# EAGLE board BATT_DCDC (EAGLE 9.6.2)
REV: C
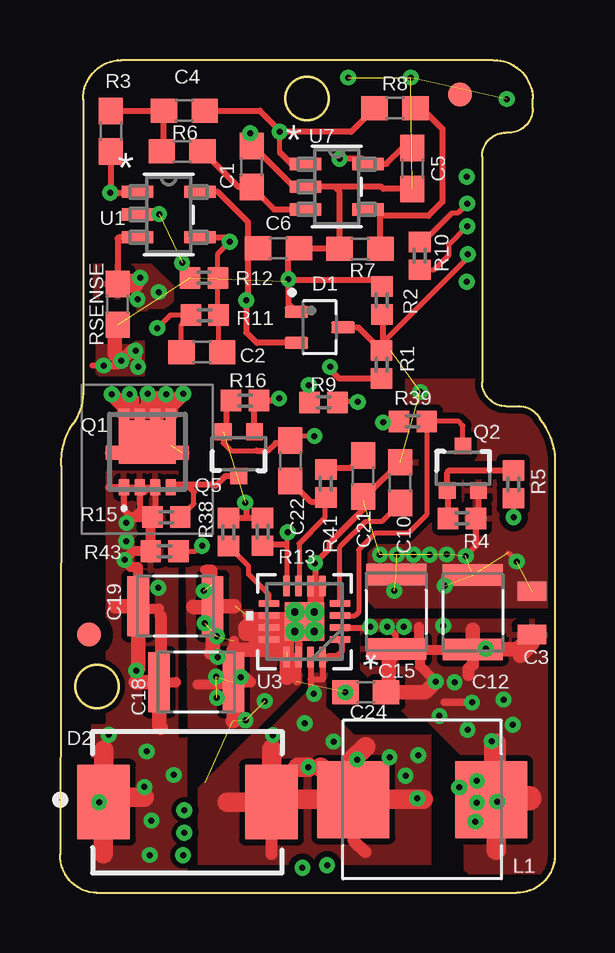
[diagram p0: board, top side]
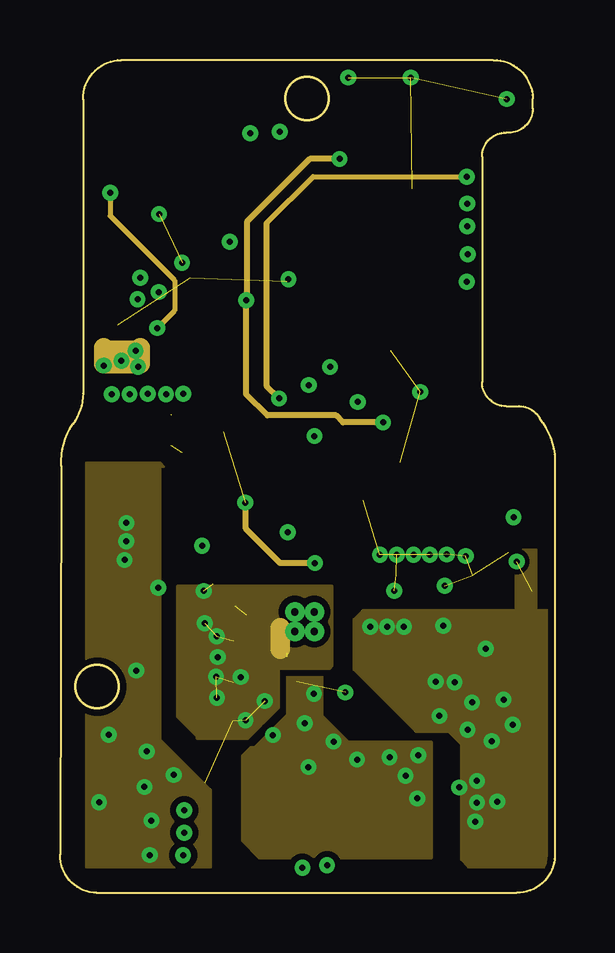
[diagram p1: board, inner layer Route2]
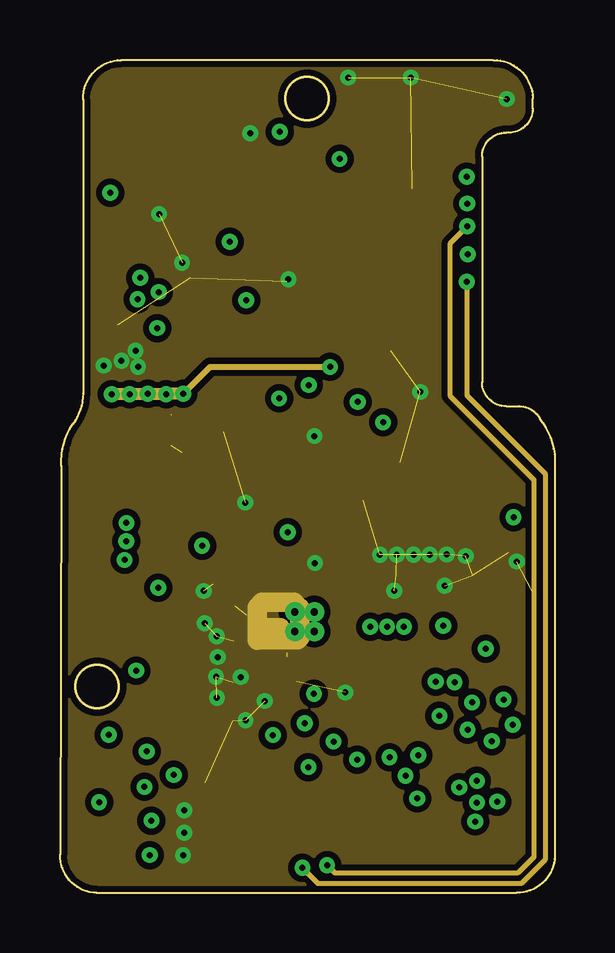
[diagram p2: board, inner layer Route15]
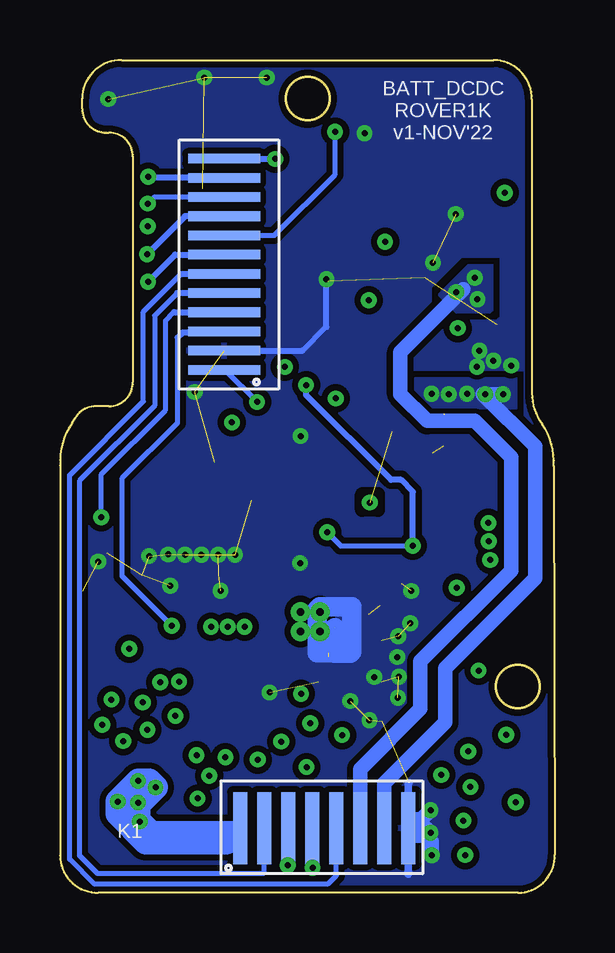
[diagram p3: board, bottom side, seen from below]

Size 20.62 x 34.7 mm. Coordinates in mm from the lower left corner, seen from the top.
Outline: 18.05,34.7 2.55,34.7 arc90 0.96,33.06 0.96,20.81 arc-37 0.53,19.53 arc37 0.05,17.79 0,1.59 arc90 1.53,0 19.03,0 arc90 20.62,1.55 20.62,17.8 arc37 20.12,19.58 arc-7 19.99,19.78 arc60 19.12,20.27 18.58,20.27 arc-90 17.58,21.27 17.58,30.67 arc-90 18.58,31.67 18.7,31.67 arc90 19.7,32.67 19.7,33.09 arc90 18.05,34.7
Outline: circle at 10.3,33.09 radius 0.9
Outline: circle at 1.55,8.59 radius 0.9
Copper layers (1+2*15+16): Top 0.035mm / dielectric 1.5mm / Route2 0.035mm / dielectric 0.15mm / Route15 0.035mm / dielectric 0.2mm / Bottom 0.035mm
Design rules "adafruit *": minimum track width 0.15mm, minimum drill 0.25mm, track to track 8mil, track to pad 8mil, pad to pad 8mil, via to via 8mil, smd to smd 5mil, copper to edge 8mil, drill to drill 8mil, minimum pad ring 10mil, minimum via ring 8mil, stop-mask expansion 2mil, vias tented up to drill 20mil, thermal gap 10mil
Net classes: 2 gnd: width 0.305 mm, drill 0.483 mm, clearance 0.203 mm
bRestrict: area 7.4,16 to 8,16.6

## Footprints (pad centres in the part's own frame; a part is rotated, then mirrored left to right if it is on the bottom)
0603-NO = smd 1.1 x 1: 1 -0.85,0; 2 0.85,0
0603 = smd 1.1 x 1: 1 -0.85,0; 2 0.85,0
0805 = smd 0.8 x 1.2: 1 -0.9,0; 2 0.9,0
WCAP-CSGP_1210 = smd 0.9 x 2.5: 1 -1.55,0; 2 1.55,0
SOT65P210X110-3N = smd 0.99 x 0.5: 1 -0.97,0.65; 2 -0.97,-0.65; 3 0.97,0
DIOM7959X250N = smd 2.2 x 3.1: A 3.5,0; C -3.5,0
FLEX8 = smd 0.6 x 3: 1 0.8,2.05; 2 1.8,2.05; 3 2.8,2.05; 4 3.8,2.05; 5 4.8,2.05; 7 5.8,2.05; 8 6.8,2.05; 9 7.8,2.05
FLEX6 = smd 0.4 x 3: 1 -2.5,-0.25; 2 -1.7,-0.25; 3 -0.9,-0.25; 4 -0.1,-0.25; 5 0.7,-0.25; 6 1.5,-0.25; 7 2.3,-0.25; 8 3.1,-0.25; 9 3.9,-0.25; 10 4.7,-0.25; 11 5.5,-0.25; 12 6.3,-0.25
INDM7366X500 = smd 3 x 3.2: 1 -2.87,0; 2 2.87,0
NVTFS5124PLTWG = smd 0.42 x 0.66: 1 -0.975,-1.47; 2 -0.325,-1.47; 3 0.325,-1.47; 4 0.975,-1.47 | smd 0.42 x 0.47: 5 0.975,1.565; 6 0.325,1.565; 7 -0.325,1.565; 8 -0.975,1.565 | smd 2.37 x 1.83: 9 0,0.415 | smd 0.545 x 0.57: 10 1.458,-0.035; 11 -1.458,-0.035
SOT323 = smd 0.7 x 0.7: 1 -0.65,-0.925; 2 0.65,-0.925; 3 0,0.925
0402 = smd 0.85 x 0.9: 1 -0.58,0; 2 0.58,0
SOT-23-5_MC_MCH = smd 1.31 x 0.508: 1 -1.295,0.95; 2 -1.295,0; 3 -1.295,-0.95; 4 1.295,-0.95; 5 1.295,0.95
RTE16_1P66X1P66_TEX = smd 0.85 x 0.28: 1 -1.475,0.75; 2 -1.475,0.25; 3 -1.475,-0.25; 4 -1.475,-0.75; 9 1.475,-0.75; 10 1.475,-0.25; 11 1.475,0.25; 12 1.475,0.75 | smd 0.28 x 0.85: 5 -0.75,-1.475; 6 -0.25,-1.475; 7 0.25,-1.475; 8 0.75,-1.475; 13 0.75,1.475; 14 0.25,1.475; 15 -0.25,1.475; 16 -0.75,1.475 | smd 1.66 x 1.6: 17 0,0 | drill 0.305 pad 0.508: V -0.406,-0.406; V_1 -0.406,0.406; V_2 0.406,-0.406; V_3 0.406,0.406
FIDUCIAL_1MM = smd 1 x 1: 1 0,0

## Placement (x,y rotation side)
C1  1u  [0603-NO]  7.98,30.26 90 top
C2  100n  [0603]  5.91,22.52 0 top
C3  10uF  [0805]  19.67,11.66 270 top
C4  1u  [0603-NO]  5.18,32.59 0 top
C5  100n  [0603]  14.68,30.18 270 top
C6  100n  [0603]  9.1,26.85 0 top
C10  47nF  [0603]  14.17,17.09 90 top
C12  47uF 16V  [WCAP-CSGP_1210]  17.2,11.69 270 top
C15  47uF 16V  [WCAP-CSGP_1210]  14.01,11.71 270 top
C18  47uF 25V  [WCAP-CSGP_1210]  5.68,8.78 180 top
C19  47uF 25V  [WCAP-CSGP_1210]  4.81,11.94 180 top
C21  2.2nF  [0603]  12.63,17.37 90 top
C22  270PF  [0603]  9.6,18 270 top
C24  0.1uF  [0603]  12.74,8.35 0 top
D1  BAT54SW,115  [SOT65P210X110-3N]  10.82,23.56 0 top
D2  B520C-13-F  [DIOM7959X250N]  5.31,3.78 0 top
K1  FLEX8  [FLEX8]  13.91,0.64 0 bottom
K2  FLEX6  [FLEX6]  14.03,24.29 90 bottom
L1  2.2uH - 74437346022  [INDM7366X500]  15.09,3.88 180 top
Q1  NVTFS9D6P04M8LTAG  [NVTFS5124PLTWG]  3.64,18.37 0 top
Q2  2N7002PW  [SOT323]  16.79,17.69 0 top
Q5  2N7002PW  [SOT323]  7.45,18.29 180 top
R1  169k  [0402]  13.4,22.01 90 top
R2  39k  [0402]  13.41,24.68 90 top
R3  2k4  [0603]  2.12,31.73 270 top
R4  100k  [0402]  16.75,15.6 180 top
R5  33R  [0402]  18.89,17.02 270 top
R6  62k  [0603]  5.09,30.9 180 top
R7  2k4  [0603]  12.5,26.83 180 top
R8  36k  [0603]  13.96,32.69 0 top
R9  5k6  [0402]  10.98,20.43 0 top
R10  330R  [0402]  14.99,26.54 270 top
R11  5k1  [0402]  6.03,24.07 0 top
R12  8k2  [0402]  6,25.62 180 top
R13  7k5  [0402]  8.44,15.04 90 top
R15  100k  [0402]  4.43,15.65 180 top
R16  100k  [0402]  7.71,20.51 180 top
R38  78k7  [0402]  7.02,15.03 270 top
R39  78k7  [0402]  14.7,19.64 0 top
R41  56k2  [0402]  11.08,17.05 90 top
R43  30k  [0402]  4.36,14.23 0 top
RSENSE  100mR  [0603]  2.4,24.52 90 top
U1  MCP6071T-E/OT  [SOT-23-5_MC_MCH]  4.53,28.26 0 top
U3  TPS55330RTET  [RTE16_1P66X1P66_TEX]  10.19,11.3 180 top
U7  MCP6071T-E/OT  [SOT-23-5_MC_MCH]  11.53,29.42 0 top
U$1  FIDUCIAL""  [FIDUCIAL_1MM]  16.66,33.26 90 top
U$2  FIDUCIAL""  [FIDUCIAL_1MM]  1.21,10.76 90 top

## Library data of the parts
C1 C4 = microbuilder
C2 = SparkFun-Capacitors; PROD_ID: CAP-00810; VALUE: 0.1uF
C3 = SparkFun-Capacitors; PROD_ID: CAP-11330
C5 C6 C24 = SparkFun-Capacitors; PROD_ID: CAP-00810
C10 = SparkFun-Capacitors; PROD_ID: CAP-08605
C12 C15 C18 C19 = Wurth_Elektronik_Passive_Capacitors_rev19a; WE-NUMBER: 885012109003/47uF
C21 = SparkFun-Capacitors; PROD_ID: CAP-07877
C22 = SparkFun-Capacitors; PROD_ID: CAP-13339
D1 = BAT54SW_115; AVAILABILITY: In Stock; DESCRIPTION: Diode Array 1 Pair Series Connection Schottky 30 V 200mA (DC) Surface Mount SC-70, SOT-323; MF: Nexperia USA Inc.; MP: BAT54SW,115; PACKAGE: SOT-323 Nexperia USA Inc.; PRICE: None; PURCHASE-URL: https://pricing.snapeda.com/search/part/BAT54SW,115/?ref=eda
D2 = B520C-13-F; AVAILABILITY: Unavailable; DESCRIPTION: Diode Schottky 20V 5A Surface Mount SMC; DIGIKEY-PURCHASE-URL: https://snapeda.com/shop?store=DigiKey&id=325969; MF: Diodes Inc.; MP: B520C-13-F; PACKAGE: DO-214 Diodes Inc.; PRICE: None
K1 = Flex_3mm
K2 = Flex
L1 = Inductance_2.2uH; DESCRIPTION: 10µH Shielded Molded Inductor 3.2A 69mOhm Max Nonstandard; DIGIKEY-PURCHASE-URL: https://snapeda.com/shop?store=DigiKey&id=586788; MF: Wurth Electronics; MP: 74437349100; PACKAGE: Nonstandard Wurth Electronics
Q1 = SamacSys_Parts; DESCRIPTION: MOSFET MV8 P INITIAL PROGRAM; HEIGHT: 0.8mm; MANUFACTURER_NAME: ON Semiconductor; MANUFACTURER_PART_NUMBER: NVTFS9D6P04M8LTAG; MOUSER_PART_NUMBER: 863-NVTFS9D6P04M8LTG; MOUSER_PRICE-STOCK: https://www.mouser.co.uk/ProductDetail/ON-Semiconductor/NVTFS9D6P04M8LTAG/?qs=xZ%2FP%252Ba9zWqYALd8g5rll2Q%3D%3D
Q2 Q5 = SparkFun-DiscreteSemi; PROD_ID: TRANS-11151
R1-R13 R15 R16 R38 R39 R41 R43 RSENSE = SparkFun-Resistors
U1 U7 = MCP6071; BUILT_BY: EMA_Jessica; COPYRIGHT: Copyright (C) 2018 Accelerated Designs. All rights reserved; MANUFACTURER_PART_NUMBER: MCP6071T-E/OT; SOURCELIBRARY: Microchip_2019-08-23_21; VENDOR: Microchip
U3 = TPS55330; BUILT_BY: EMA_UL_Team; MANUFACTURER_PART_NUMBER: TPS55330RTET; SOURCELIBRARY: TI_2015-1-5; VENDOR: Texas Instruments
U$1 U$2 = microbuilder; BOM: EXCLUDE

## Nets
!RESET: K2.10 R10.1
COMP_TPS: C22.2 R41.1 U3.7
EN_DCDC: K2.4 R5.2
EN_TPS: Q2.3 R39.2 U3.3
FB: R9.1 R13.1 R43.2 U3.8
FB_DAC: K2.1 R9.2
FREQ_TPS: R38.2 U3.9
GND: C1.2 C3.1 C5.2 C6.2 C10.2 C12.1 C15.1 C18.1 C19.1 C21.1 C22.1 C24.1 D1.1 K1.9 K2.2 Q2.2 Q5.2 R2.2 R4.1 R7.2 R12.2 R13.2 R16.2 R38.1 RSENSE.1 U1.2 U3.5 U3.6 U3.10 U3.11 U3.12 U3.13 U3.14 U3.17 U7.2
IOSENSE: C4.2 K2.8 R8.1 U7.1
ISENSE_RAW: C2.1 R3.2 R11.1 U1.1
N$1: C2.2 R11.2 R12.1 U1.4
N$2: R7.1 R8.2 U7.4
N$3: C4.1 R3.1 R6.2
N$4: Q2.1 R4.2 R5.1
N$5: C1.1 R6.1 U7.3
N$6: K1.3 R10.2
N$8: Q1.4 Q5.3 R15.1
N$35: C10.1 U3.4
N$43: C21.2 R41.2
OP_SWITCH: K2.11 Q5.1 R16.1
SW2_TPS: D2.A L1.2 U3.1 U3.15 U3.16
SWCLK: K1.5 K2.6
SWDIO: K1.2 K2.5
TXO: K1.4 K2.7
VBUS: C3.2 C12.2 C15.2 C24.2 K1.1 K2.3 L1.1 U3.2
VCC: C5.1 C6.1 D1.2 K2.12 R39.1 U1.5 U7.5
VOUT+: K1.8 Q1.5 Q1.6 Q1.7 Q1.8 Q1.9 Q1.10 Q1.11 R1.1
VOUT-: K1.7 RSENSE.2 U1.3
VOUTSENSE: D1.3 K2.9 R1.2 R2.1
VSOURCE: C18.2 C19.2 D2.C Q1.1 Q1.2 Q1.3 R15.2 R43.1

## Tracks (layer width: path | path; a pad name or v marks a point on that pad's centre or on a via)
!RESET  (via drill 0.25)
  Top 0.203: v16.96,28.72 16.56,28.32 16.33,28.32 15.13,27.12 R10.1
  Bottom 0.203: K2.10 16.69,28.99 v16.96,28.72
COMP_TPS
  Top 0.203: U3.7 9.96,12.79 9.96,14.55 11.04,15.63 11.04,16.43 R41.1
  Top 0.254: R41.1 10.91,16.3 10.45,16.3 C22.2
EN_DCDC  (via drill 0.25)
  Top 0.203: R5.2 v18.89,15.66 v18.9,15.65
  Bottom 0.203: 15.88,24.19 16.22,23.84 16.22,20.11 18.9,17.44 v18.9,15.65
  Bottom 0.254: 15.88,24.19 K2.4
EN_TPS
  Top 0.2: 14.44,14.99 14.25,14.99
  Top 0.203: U3.3 12.3,11.55 12.44,11.69 12.44,14.29 13.14,14.99 14.25,14.99 | Q2.3 16.79,19.47 16.62,19.64 R39.2 15.28,15.76 14.51,14.99 14.44,14.99
FB  (via drill 0.25)
  Top 0.203: R9.1 10.3,20.53 | R43.2 5.63,14.23 5.86,14.46 v5.92,14.46 | v9.49,15.02 9.44,14.97 9.44,14.53 U3.8
  Top 0.254: v10.37,21.16 10.37,20.53 10.3,20.53 | R13.1 8.51,14.53 9.44,14.53
  Bottom 0.203: v9.49,15.02 8.93,14.46 v5.92,14.46
  Bottom 0.254: v5.92,14.46 5.92,16.71 6.41,17.2 6.83,17.2 10.37,20.74 v10.37,21.16
FB_DAC  (via drill 0.25)
  Top 0.203: v12.41,20.45 11.58,20.45 R9.2
  Bottom 0.203: v12.41,20.45 13.75,21.79
  Bottom 0.254: 13.75,21.79 K2.1
FREQ_TPS
  Top 0.203: U3.9 8.7,12.06 8.7,12.43 7.84,13.29 7.84,13.62 R38.2
GND  (via drill 0.25)  (35 unrouted)
  Top 0.15: 6.55,10.71 v6.53,10.69
  Top 0.2: 10.44,12.47 10.44,12.43 | C21.1 12.63,16.41 12.63,16.36 | U3.5
  Top 0.203: C22.1 9.78,19.03 v10.6,19.03 | 18.67,14.16 v19.03,13.8 | R4.1 17.44,15.71 | 17.33,14.45 v16.91,14.03 | C1.2 7.93,31.16 v7.93,31.65 | R12.2 5.42,25.91 v5.08,26.25 | Q5.2 6.8,18.74 7.12,18.42 8.19,18.42
  Top 0.254: U3.12 8.67,10.5 | U3.14 9.94,9.76 | 9.44,9.76 U3.13 | U1.2 4.05,28.26 4.08,28.23 v4.13,28.28 | C19.1 6.04,12.26 6.04,12.54 6.38,12.88 | C10.2 12.91,16.68 12.63,16.68 C21.1 | v1.82,21.97 1.35,21.97 | R16.2 7.11,20.51 6.92,20.32 6.92,19.33 Q5.2 | C1.2 8.28,30.81 8.34,30.81 9.73,29.42 U7.2 11.54,29.42 | 11.54,29.42 13.38,29.42 13.47,29.33 C5.2 | 17.44,15.71 Q2.2 | R4.1 17.33,14.45 | R2.2 13.14,25.53 9.52,25.53 9.44,25.45 | 9.44,25.48 v9.52,25.56 | C22.1 9.49,18.74 8.98,18.74 8.66,18.42 8.19,18.42 | 11.54,29.42 11.49,29.37 11.65,29.21 R7.2 11.63,26.85 C6.2 9.52,26.42 v9.52,25.56 | 10.7,12.76 10.65,12.81 10.65,13.71 v10.62,13.74 11.23,14.35 11.23,14.59 12.63,15.99 12.63,16.41 | R38.1 7.75,15.62 | 7.75,15.62 R13.2 | v7.72,16.26 7.75,16.23 7.75,15.62 | v9.52,25.56 9.52,24.54 D1.1
  Top 0.305: v3.15,22.58 3.25,22.48 v3.25,21.92 | v1.82,21.97 2.38,21.97 2.56,22.15 v2.56,22.17 | U3.10 8.7,11.54 7.82,11.54 7.77,11.59 | U3.11 7.72,11.05 7.6,10.93 7.75,10.79 7.98,10.55 U3.12 | U3.10 8.72,11.03 | 8.72,11.03 U3.12 | U3.12 8.72,9.95 8.83,9.83 U3.14 | U3.6 10.44,12.47 | U3.17 10.47,11.58 10.47,12.75 U3.6 | U3.17 10.85,11.96 10.85,12.7 U3.5 10.92,12.76 10.7,12.76 10.46,12.76 U3.6 | U3.17 9.94,11.55 U3.10 | U3.17 9.92,11.03 8.72,11.03 | U3.17 9.44,10.55 | 9.44,10.55 U3.12 | 9.44,10.55 U3.13 9.44,8.96 9.44,8.91 9.43,8.9 | U3.17 9.94,11.05 U3.14 | U3.14 9.91,9.79 9.91,8.84 9.86,8.79 | v6.57,9.82 6.39,10 6.31,10 | 7.26,11.94 7.29,11.97
  Top 0.406: C18.1 7.13,8.68 5.73,8.68 | 7.24,10.5 7.24,10.12 C18.1 | 6.05,13.45 6.36,13.45 C19.1 6.36,11.96 | C18.1 7.96,8.78 7.75,8.99 v7.53,8.99
  Top 0.508: v3.15,22.58 3.09,22.64 3.03,22.64 v2.56,22.17
  Top 0.61: RSENSE.1 2.28,23.55 2.28,22.45 v2.56,22.17 | C19.1 6.32,11.9 5.58,11.9 5.56,11.92 | C19.1 7.26,11.94 | C19.1 6.36,10.05 6.31,10 | C18.1 7.23,7.17 7.2,7.14 | U3.17 7.97,11.3 7.72,11.05 | U3.17 9.67,10.79 7.75,10.79 | U3.17 9.44,10.55 9.44,8.96 | U3.17 9.01,10.12 7.24,10.12 | U3.17 10.7,11.81 10.7,12.76
  Route2 0.254: v10.62,13.74 9.17,13.74 7.74,15.17 7.74,16.24 v7.72,16.26
  Route2 0.61: 1.83,22.72 3.34,22.72
  Route2 0.813: 9.17,11.04 9.17,10.14 | 3.34,22.72 3.34,22.04 1.83,22.04 1.83,22.72
  Route15 0.813: 9.17,11.04 8.69,11.04 8.3,10.65 8.41,10.54 9.9,10.54 9.99,10.63 9.99,11.88 9.77,12.1 8.41,12.1 8.21,11.9 8.21,10.52
  Bottom 0.203: 10.51,22.59 9.52,23.58
  Bottom 0.254: K2.2 10.51,22.59 | 9.52,23.58 v9.52,25.56
  Bottom 0.305: 6.06,4.58 6.11,4.53 K1.9 6.12,0.77
  Bottom 0.61: K1.9 6.11,3.06 5.56,3.06 v5.18,3.44 | v5.18,2.5 5.37,2.69 K1.9 | v5.13,1.56 5.13,2.12 5.39,2.38 6.11,2.38 K1.9
  Bottom 0.813: 9.17,11.04 9.17,9.99 8.53,9.99 8.47,10.05 8.47,11.92 9.8,11.92 9.91,11.81 9.91,10 9.45,10
  other vias: 13.93,12.59 16.03,12.79 16.11,14.1 15.41,14.09 14.73,14.09 14.03,14.09 13.33,14.09 8.53,7.99 7.73,7.19 6.54,8.13 6.5,9 6.03,11.23 5.99,12.58 11.89,8.35 12.01,33.97 14.61,33.97 18.61,33.07 15.01,20.87
  pour Top (isolate 0.003): 5.37,6.88 5.29,13.59 5.37,13.61 7.5,13.61 7.5,11.79 10.15,11.79 10.15,8.81 8.22,6.88
  pour Top (isolate 0.254, no thermals): 20.41,11.89 20.41,14.49 12.95,14.49 11.73,13.28 13.12,11.89
  pour Bottom (isolate 0.254, rank 3): 22.5,-0.87 22.5,34.63 -0.41,34.63 -0.41,0.79 1.25,-0.87
  pour Route2 (isolate 0.254): 5.71,6.44 7.82,6.44 9.09,7.71 9.09,9.36 11.23,9.36 11.32,9.45 11.32,12.77 4.91,12.77 4.91,7.33 5.73,6.51
  pour Route15 (isolate 0.254, rank 2): 22.67,-0.84 22.67,34.87 -0.36,34.87 -0.36,-0.84
  pour Top (isolate 0.305): 1.51,22.87 1.51,21.67 1.61,21.57 3.51,21.57 3.51,22.97 1.51,22.97
  pour Top (isolate 0.254, rank 3): 14.41,21.37 14.41,13.67 21.11,13.67 21.11,21.37
IOSENSE  (via drill 0.25)
  Top 0.203: 9.17,30.83 9.16,30.85 9.16,31.76
  Top 0.254: C4.2 8.33,32.59 9.16,31.76 9.16,31.75 v9.16,31.71 12.13,31.71 R8.1 | U7.1 9.64,30.37 9.17,30.83
  Bottom 0.203: K2.8 11.69,27.39 9.16,29.92 v9.16,31.71
ISENSE_RAW  (via drill 0.25)
  Top 0.203: C2.1 5.06,23.68 R11.1 4.59,24.07 v4.05,23.53
  Top 0.254: U1.1 3.2,29.17 v2.09,29.17 2.12,29.2 R3.2
  Route2 0.203: v2.09,29.17 2.09,28.2 4.78,25.51 4.78,24.26 v4.05,23.53
N$1  (via drill 0.25)
  Top 0.203: C2.2 6.61,22.67 R11.2 6.58,24.1 R12.1 6.58,26.63 v7.08,27.13
  Top 0.254: v7.08,27.13 7.08,27.15 6.92,27.31 U1.4
N$2
  Top 0.254: U7.4 13.11,28.47 13.37,28.21 | R8.2 15.08,32.69 15.93,31.84 15.93,28.79 15.35,28.21 13.37,28.21 | R7.1 13.35,28.19 13.37,28.21
N$3
  Top 0.254: R3.1 C4.1 4.33,30.99 R6.2
N$4
  Top 0.203: 16.17,16.73 Q2.1
  Top 0.254: Q2.1 16.14,17.52 16.22,17.6 R5.1 | R4.2 16.17,16.73
N$5
  Top 0.254: R6.1 7.43,29.41 C1.1 8.92,28.47 U7.3
N$6  (via drill 0.25)
  Top 0.203: R10.2 15.59,25.96 16.19,26.56 16.19,26.99 v16.97,27.77
  Route15 0.203: v16.97,27.77 16.24,27.04 16.24,20.72 19.74,17.22 19.74,1.49 19.07,0.82 11.46,0.82 v11.13,1.15
  Bottom 0.203: v11.13,1.15 11.11,1.17 K1.3
N$7
  pour Route15 (isolate 0.254): 7.42,16.56 7.42,15.98 8.01,15.98 8.01,16.56
N$8
  Top 0.203: 6.48,17.01 6.48,16.95 | R15.1 5.58,16.21 5.58,16.71
  Top 0.254: 6.48,17.01 4.73,17.01 Q1.4 5.38,16.9 5.58,16.71 | Q5.3 6.89,17.36 6.48,16.95
N$35
  Top 0.203: U3.4 11.67,14.41 12.72,15.47 13.4,15.47 C10.1
N$43
  Top 0.254: C21.2 12.12,17.71 11.16,17.71 R41.2
OP_SWITCH  (via drill 0.25)
  Top 0.254: Q5.1 8.1,20.51 R16.1 9.09,20.51 9.16,20.57 v9.13,20.6
  Route2 0.203: v16.95,29.84 10.55,29.84 8.6,27.89
  Route2 0.254: 8.6,27.89 8.6,21.13 v9.13,20.6
  Bottom 0.203: 16.9,29.79 v16.95,29.84
  Bottom 0.254: K2.11 16.9,29.79
SW2_TPS  (via drill 0.25)
  Top 0.15: 11.04,9.73 U3.16 10.5,9.83 10.47,9.79
  Top 0.2: v10.58,8.29 10.61,8.32
  Top 0.203: 10.61,8.32 10.44,8.15
  Top 0.254: 11.04,9.73 11.16,9.85 11.52,9.85 11.74,10.07 11.74,10.4 11.67,10.48 U3.1 | U3.15 | U3.15 10.44,8.88 | 10.44,8.88 10.44,8.15 | U3.16 10.94,8.98 10.98,8.94 10.92,8.88 10.44,8.88
  Top 0.508: D2.A 8.92,3.89 | D2.A 8.44,3.78 8.23,3.99 | D2.A 8.81,1.62 | D2.A 8.83,3.8 | L1.2 12.22,2.2 12.73,1.69 | 9.9,5.24 8.81,4.15
  Top 0.61: 10.86,5.24 v10.35,5.24
  Top 0.813: 8.83,3.8 8.83,5.99 | 8.92,3.89 15.14,3.89 | 12.73,6.09 12.22,5.58 L1.2 10.86,5.24 | 6.97,3.77 6.98,3.78 D2.A 8.81,4.15 | 9.9,5.24 v10.35,5.24
  other vias: 12.38,5.55 11.4,6.3 8.87,6.57 14.93,5.73 14.89,3.93 10.2,7.06 13.73,5.65 14.4,4.88
  pour Top (isolate 0.254, rank 2): 15.47,1.19 15.47,6.57 12.26,6.57 11.15,7.68 11.15,10.61 10.19,10.61 10.19,8.79 5.74,4.34 5.74,1.19
  pour Route2 (isolate 0.254, rank 2, no thermals): 15.46,1.47 15.46,6.27 12.01,6.27 10.91,7.37 10.91,10.07 10.61,10.37 9.31,10.37 9.31,7.41 7.61,5.71 7.61,2.17 8.31,1.47
SWCLK
  Bottom 0.203: 15.56,25.79 17.15,24.2 17.15,20.48 20.22,17.4 20.22,1.39 19.22,0.39 9.44,0.39 9.11,0.72 K1.5
  Bottom 0.254: 15.56,25.79 K2.6
SWDIO
  Bottom 0.203: K1.2 12.14,2.66 12.14,0.8 19.06,0.8 19.82,1.56 19.82,17.16 16.68,20.3 16.68,24.05 15.74,24.99
  Bottom 0.254: K2.5 15.74,24.99
TXO  (via drill 0.25)
  Route15 0.203: v10.1,1.04 10.76,0.38 19.21,0.38 20.21,1.38 20.21,17.47 16.95,20.73 v16.95,25.46
  Bottom 0.203: v10.1,1.04 v10.11,1.04 K1.4
  Bottom 0.254: v16.95,25.46 15.83,26.59 K2.7
VBUS  (via drill 0.25)
  Top 0.203: 11.97,11.04 12,11.01 11.7,11.01 U3.2 | 12.89,11.04 12.92,11.07
  Top 0.254: 11.97,11.04 12.89,11.04 | v13.63,11.09 13.97,10.75 13.97,10.2 C15.2
  Top 0.305: 16.01,7.93 v17.17,7.93 | C12.2 17.4,10.14
  Top 0.406: 17.4,10.14 17.43,10.11 | C15.2 14.95,10.16 14.96,10.15 | 15.01,10.1 16.18,10.1 16.24,10.04 | v15.66,8.8 15.01,9.45 15.01,10.1 | 15.01,10.1 14.96,10.15 | 14.96,10.15 14.96,11.08
  Top 0.508: L1.1 17.75,4.09 17.33,4.09 | L1.1 18.17,3.67 | L1.1 18.18,4.1 | 14.03,10.18 C15.2 | C12.2 17.2,9.52 17.03,9.35 17.03,9.07
  Top 0.61: v15.66,8.8 15.21,8.35 C24.2 13.69,8.45 13.69,9.74 14.01,10.06 C15.2 | C3.2 19.05,10.14 C12.2 17.2,10.95 | C3.2 19.67,10.37 19.17,9.87 19.17,10.26 C3.2 | L1.1 17.96,6.29 v17.99,6.32
  Top 0.813: 18.17,3.67 18.17,1.77 | 18.18,4.1 18.18,6.24
  Top 1.016: 19.56,3.94 18.02,3.94 L1.1
  Bottom 0.203: K2.3 13.82,23.35 | 15.73,23.13 15.73,19.57 18.04,17.27 18.04,13.2 v15.97,11.13
  Bottom 0.254: 13.82,23.35 15.52,23.35 15.73,23.13
  Bottom 0.61: 17.02,2.69 K1.1 13.69,2.11
  Bottom 1.016: 17.02,2.69 v17.3,2.97 | v18.22,3.8 17.39,2.97 v17.3,2.97 | v17.3,2.97 17.37,3.04 v17.37,3.76 17.27,3.76 v16.64,4.39 16.91,4.66 v17.37,4.66 v18.22,3.81 v18.22,3.8 | 13.69,2.11 17.04,2.11 18.22,3.29 v18.22,3.8
  other vias: 17.74,10.17 16.98,6.79 16.44,8.77 14.33,11.09 12.93,11.09 18.48,8.05 18.86,7 15.81,7.37
  pour Top (isolate 0.254, rank 2): 20.46,0.79 20.46,11.39 12.9,11.39 12.52,11.01 12.52,9.31 14.64,7.19 15.26,7.19 16.83,5.62 16.83,0.99 17.03,0.79
  pour Route2 (isolate 0.254, rank 2, no thermals): 21.11,1.07 21.11,10.97 20.31,11.77 12.61,11.77 12.23,11.39 12.23,9.29 14.82,6.7 16.18,6.7 16.71,6.17 16.71,1.37 17.01,1.07
  pour Route2: 18.97,11.62 19.84,11.62 19.86,11.6 19.86,14.3 18.96,14.3 18.96,11.6
VCC  (via drill 0.25)
  Top 0.203: v7.76,24.69 7.83,24.76 | U7.5 12.61,30.58 | 13.5,19.64 v13.46,19.6
  Top 0.254: 5.81,29.2 U1.5 6.58,29.21 7.83,27.96 7.83,26.9 | v7.76,24.69 7.76,23.35 8.16,22.95 8.2,22.91 D1.2 | 7.83,26.9 7.83,24.76 | 12.61,30.58 v11.65,30.58 | R39.1 13.5,19.64 | U7.5 13.6,30.37 14.26,31.03 C5.1 | C6.1 7.88,26.85 7.83,26.9
  Route2 0.203: v7.76,24.69 7.79,24.72
  Route2 0.254: v7.76,24.69 7.76,20.78 8.65,19.89 11.5,19.89 11.79,19.6 v13.46,19.6 | v11.65,30.58 10.41,30.58 7.79,27.96 7.79,24.72
  Bottom 0.203: v11.66,30.59 v11.65,30.58
  Bottom 0.254: K2.12 v11.66,30.59
VOUT+  (via drill 0.25)  (2 unrouted)
  Top 0.2: Q1.5 4.63,19.05 4.63,18.62
  Top 0.254: 2.2,18.31 Q1.11 | Q1.7 4.1,19.93 | 4.63,19.05 4.63,18.79 | 4.24,20.47 4.24,20.59 4.05,20.78 | v11.25,21.91 11.25,21.8 11.62,21.43 R1.1
  Top 0.406: v2.16,20.77 2.61,20.32 2.61,19.99 Q1.8 4.1,19.93 | v2.9,20.77 3.09,20.57 3.09,20.15 Q1.7 | v3.66,20.79 3.8,20.64 3.8,20.09 Q1.6 | 4.24,20.47 4.42,20.65 v4.42,20.77 4.35,20.84
  Top 0.61: v5.14,20.79 4.62,20.27 Q1.5 | v2.16,20.77 2.67,20.26 Q1.8 | v3.66,20.79 3.66,20.28 Q1.7 | 4.24,20.47 4.1,20.33 4.1,19.93 | Q1.11 4.29,18.33 | 4.29,18.33 Q1.10 3.64,18.33 Q1.9 3.84,18.79 4.29,18.33
  Route15 0.254: v5.14,20.79 6.26,21.91 v11.25,21.91
  Route15 0.406: 4.44,20.79 v4.42,20.77
  Route15 0.508: v5.14,20.79 4.44,20.79 | v4.42,20.77 3.68,20.77 v3.66,20.79 3.64,20.77 v2.9,20.77 v2.16,20.77
  Bottom 0.61: K1.8 7.11,4.57 4.58,7.1 4.58,9.36 0.83,13.11 0.83,18.6 3,20.77 2.52,20.77 v2.16,20.77
  pour Bottom: 1.61,21.27 1.61,20.17 5.81,20.17 5.81,21.47 1.61,21.47
VOUT-  (via drill 0.25)
  Top 0.15: RSENSE.2 2.4,24.9
  Top 0.203: 2.3,25.47 RSENSE.2
  Top 0.254: 3.21,27.29 U1.3 2.45,27.31 2.4,27.27 RSENSE.2
  Top 0.508: RSENSE.2 2.42,25.39 | 3.1,25.39 v3.34,25.63
  Top 0.61: 2.46,25.43 RSENSE.2
  Top 0.813: 3.1,25.39 2.42,25.39
  Bottom 0.61: 3.81,25.15 6.44,22.52 6.44,20.78 5.32,19.66 3.33,19.66 1.82,18.15 1.82,13.43 5.6,9.65 5.6,7.66 8.11,5.16 K1.7
  other vias: 3.23,24.73 4.11,25.03
  pour Top (isolate 0.254): 1.41,26.17 1.41,24.87 1.51,24.77 2.91,24.77 3.21,24.47 3.21,24.27 3.61,24.27 3.71,24.37 4.41,24.37 4.71,24.67 4.71,25.27 3.81,26.17 3.61,26.17
  pour Bottom (isolate 0.254, no thermals): 2.61,26.07 2.61,24.27 2.71,24.17 4.11,24.17 4.81,24.87 4.81,24.97 3.61,26.17 2.61,26.17
VOUTSENSE  (via drill 0.25)
  Top 0.203: R1.2 13.4,22.88 16.99,26.47 v16.99,26.61
  Top 0.254: R2.1 13.44,24.13 13.44,22.63 R1.2 12.43,23.56 D1.3
  Bottom 0.254: K2.9 15.41,28.19 v16.99,26.61
VSOURCE  (via drill 0.25)
  Top 0.15: Q1.1 Q1.3
  Top 0.254: 3.54,16.7 3.34,16.9 Q1.1 | R43.1 3.52,13.97 | Q1.2 3.31,15.96 3.01,15.65 | Q1.3 3.96,15.77 R15.2 | Q1.1 2.02,16.9 2.01,16.89 | Q1.1 2.66,15.97 2.99,15.63
  Top 0.305: Q1.2 3.31,16.84 3.93,16.84
  Top 0.406: 4.35,8.78 C18.2 4.83,8.78 4.83,8.76 | 4.12,11.84 3.26,11.84 C19.2 3.26,13.57 2.94,13.57 | 2.3,11.94 2.3,11.96 | 3.15,8.78 3.15,8.75 | v2.77,15.41 2.99,15.63 3.01,15.65 R15.2 3.78,15.58 R43.1 3.05,14.23 v2.69,13.87
  Top 0.508: 4.19,11.53 4.19,8.84 C18.2 | D2.C | D2.C 2.01,3.98 | D2.C 1.97,3.94
  Top 0.61: 4.2,6.88 4.13,6.95 C18.2 3.15,8.78 | 2.3,11.94 C19.2 3.26,9.34 v3.18,9.26
  Top 0.813: 1.82,5.93 D2.C | 2.01,3.98 3.5,3.98 | D2.C 1.81,1.62
  other vias: 1.63,3.77 3.81,3.01 3.61,5.89 3.52,4.41 4.74,4.91 3.74,1.57 2.03,6.59 2.76,14.65 4.09,12.71
  pour Route2 (isolate 0.254, no thermals): 6.28,1.07 6.28,4.3 4.18,6.4 4.18,17.76 4.32,17.76 4.17,17.91 1.09,17.91 1.09,1.07
  pour Top: 5.29,6.42 4.9,6.42 4.9,17.54 1.93,17.54 1.93,6.99 1.33,6.99 1.33,0.97 5.29,0.97

## Text on the board
bNames: BATT_DCDC / ROVER1K / v1-NOV'22